# EAGLE board Tinkercad_Circuit (EAGLE 9.7.0)

Size 331.8 x 153.48 mm. Coordinates in mm from the lower left corner, seen from the top.
Outline: 0,0 331.8,0 331.8,153.48 0,153.48 0,0
Copper layers (1*16): Top 0.035mm / dielectric 1.5mm / Bottom 0.035mm
Design rules "default": minimum track width 6mil, minimum drill 0.35mm, track to track 6mil, track to pad 6mil, pad to pad 6mil, via to via 6mil, smd to smd 6mil, copper to edge 40mil, drill to drill 6mil, minimum pad ring 10mil, minimum via ring 8mil, stop-mask expansion 4mil, vias tented up to drill 0mil, thermal gap 10mil

## Footprints (pad centres in the part's own frame; a part is rotated, then mirrored left to right if it is on the bottom)
LEDRD254W60D565H860B = drill 0.981 pad 1.581: 1 -1.27,0; 2 1.27,0
BATTERY-GENERIC = drill 1.118 pad 3.15 octagon: + 2.54,0; - -2.54,0
RESAD1016W63L850D250B = drill 0.83 pad 1.43: 1 -5.08,0; 2 5.08,0
SWITCH-SPDT-PTH-8.5X3.7MM = drill 1.016 pad 1.88: 1 -2.54,0; 2 0,0; 3 2.54,0
DIP762W53P254L1969H508Q14B = drill 0.743 pad 1.343: 1 -3.81,7.62; 2 -3.81,5.08; 3 -3.81,2.54; 4 -3.81,0; 5 -3.81,-2.54; 6 -3.81,-5.08; 7 -3.81,-7.62; 8 3.81,-7.62; 9 3.81,-5.08; 10 3.81,-2.54; 11 3.81,0; 12 3.81,2.54; 13 3.81,5.08; 14 3.81,7.62

## Placement (x,y rotation side)
D1  RED  [LEDRD254W60D565H860B]  149.84,88.52 180 top
D2  RED  [LEDRD254W60D565H860B]  149.11,34.85 180 top
D3  RED  [LEDRD254W60D565H860B]  325.53,90.64 180 top
D4  RED  [LEDRD254W60D565H860B]  325.74,34.37 180 top
D5  RED  [LEDRD254W60D565H860B]  268.09,145.57 180 top
P1  BATTERYGENERIC  [BATTERY-GENERIC]  111.37,144.66 180 top
R1  1k  [RESAD1016W63L850D250B]  46.97,63.12 90 top
R2  1k  [RESAD1016W63L850D250B]  6.33,63.12 90 top
R3  1k  [RESAD1016W63L850D250B]  16.49,63.12 90 top
R4  1k  [RESAD1016W63L850D250B]  26.65,63.12 90 top
R5  1k  [RESAD1016W63L850D250B]  36.81,63.12 90 top
R6  1k  [RESAD1016W63L850D250B]  148.57,65.66 90 top
R7  1k  [RESAD1016W63L850D250B]  147.84,9.45 90 top
R8  1k  [RESAD1016W63L850D250B]  324.26,65.24 90 top
R9  1k  [RESAD1016W63L850D250B]  324.47,8.97 90 top
R10  1k  [RESAD1016W63L850D250B]  266.82,120.17 90 top
SA  TOGGLE  [SWITCH-SPDT-PTH-8.5X3.7MM]  8.87,78.36 0 top
SB  TOGGLE  [SWITCH-SPDT-PTH-8.5X3.7MM]  19.03,78.36 0 top
SC  TOGGLE  [SWITCH-SPDT-PTH-8.5X3.7MM]  29.19,78.36 0 top
SD  TOGGLE  [SWITCH-SPDT-PTH-8.5X3.7MM]  39.35,78.36 0 top
SE  TOGGLE  [SWITCH-SPDT-PTH-8.5X3.7MM]  49.51,78.36 0 top
U1  74HC04_PDIP  [DIP762W53P254L1969H508Q14B]  67.29,82.17 90 top
U2  74HC32_PDIP  [DIP762W53P254L1969H508Q14B]  87.61,82.17 90 top
U3  74HC11_PDIP  [DIP762W53P254L1969H508Q14B]  107.93,82.17 90 top
U4  74HC32_PDIP  [DIP762W53P254L1969H508Q14B]  128.25,82.17 90 top
U5  74HC32_PDIP  [DIP762W53P254L1969H508Q14B]  124.98,25.96 90 top
U6  74HC11_PDIP  [DIP762W53P254L1969H508Q14B]  104.66,25.96 90 top
U7  74HC32_PDIP  [DIP762W53P254L1969H508Q14B]  84.34,25.96 90 top
U8  74HC08_PDIP  [DIP762W53P254L1969H508Q14B]  64.02,25.96 90 top
U9  74HC04_PDIP  [DIP762W53P254L1969H508Q14B]  43.7,25.96 90 top
U10  74HC08_PDIP  [DIP762W53P254L1969H508Q14B]  220.12,81.75 90 top
U11  74HC08_PDIP  [DIP762W53P254L1969H508Q14B]  240.44,81.75 90 top
U12  74HC04_PDIP  [DIP762W53P254L1969H508Q14B]  199.8,81.75 90 top
U13  74HC11_PDIP  [DIP762W53P254L1969H508Q14B]  281.08,81.75 90 top
U14  74HC32_PDIP  [DIP762W53P254L1969H508Q14B]  260.76,81.75 90 top
U15  74HC32_PDIP  [DIP762W53P254L1969H508Q14B]  301.4,81.75 90 top
U16  74HC04_PDIP  [DIP762W53P254L1969H508Q14B]  200.01,25.48 90 top
U17  74HC32_PDIP  [DIP762W53P254L1969H508Q14B]  301.61,25.48 90 top
U18  74HC08_PDIP  [DIP762W53P254L1969H508Q14B]  240.65,25.48 90 top
U19  74HC32_PDIP  [DIP762W53P254L1969H508Q14B]  260.97,25.48 90 top
U20  74HC08_PDIP  [DIP762W53P254L1969H508Q14B]  281.29,25.48 90 top
U21  74HC11_PDIP  [DIP762W53P254L1969H508Q14B]  220.33,25.48 90 top
U22  74HC04_PDIP  [DIP762W53P254L1969H508Q14B]  210.94,136.68 90 top
U23  74HC11_PDIP  [DIP762W53P254L1969H508Q14B]  251.58,136.68 90 top
U24  74HC32_PDIP  [DIP762W53P254L1969H508Q14B]  231.26,136.68 90 top

## Library data of the parts
D1-D5 = Tinkercad; CATEGORY: Opto-Electronic; SUB-CATEGORY: LED; VALUE: LED_RED
P1 R1-R10 SA SB SC SD SE U1-U24 = Tinkercad

## Nets
D1_C: D1.2 R6.2
D2_C: D2.2 R7.2
D3_C: D3.2 R8.2
D4_C: D4.2 R9.2
D5_C: D5.2 R10.2
P1+: P1.+ R1.1 R2.1 R3.1 R4.1 R5.1 U1.14 U2.14 U3.14 U4.14 U5.14 U6.14 U7.14 U8.14 U9.14 U10.14 U11.14 U12.14 U13.14 U14.14 U15.14 U16.14 U17.14 U18.14 U19.14 U20.14 U21.14 U22.14 U23.14 U24.14
P1-: P1.- R6.1 R7.1 R8.1 R9.1 R10.1 SA.2 SB.2 SC.2 SD.2 SE.2 U1.7 U2.7 U3.7 U4.7 U5.7 U6.7 U7.7 U8.7 U9.7 U10.7 U11.7 U12.7 U13.7 U14.7 U15.7 U16.7 U17.7 U18.7 U19.7 U20.7 U21.7 U22.7 U23.7 U24.7
U1_1Y: U1.2 U3.13
U2_1Y: U2.3 U3.2
U3_1Y: U3.12 U4.1
U4_1Y: D1.1 U4.3
U5_1B: U5.2 U6.12
U5_1Y: D2.1 U5.3
U6_1A: R3.2 SB.1 U3.1 U6.1 U9.13 U10.2 U12.9 U13.13 U14.2 U16.3 U18.4
U6_2A: R2.2 SA.1 U4.2 U6.3 U9.5 U16.1 U18.1 U23.13
U6_2B: U6.4 U9.12
U6_2Y: U5.1 U6.6
U7_1Y: U6.13 U7.3
U7_2B: R1.2 SE.1 U1.1 U7.1 U7.5 U12.3 U13.2 U16.11 U18.9 U21.5 U22.1
U7_2Y: U6.5 U7.6
U8_1Y: U7.2 U8.3
U9_1A: R4.2 SC.1 U2.1 U9.1 U10.4 U11.5 U16.5 U18.5 U18.10 U21.1 U24.1
U9_1Y: U8.1 U9.2
U9_2A: R5.2 SD.1 U2.2 U7.4 U9.3 U10.5 U12.1 U12.5 U16.9 U21.4 U24.2
U9_2Y: U8.2 U9.4
U9_3Y: U6.2 U9.6
U10_2Y: U10.6 U14.1
U11_2Y: U11.6 U15.5
U11_3Y: U11.8 U15.1
U12_1Y: U10.1 U12.2
U12_2Y: U11.10 U12.4
U12_3Y: U12.6 U13.1
U12_4Y: U11.4 U12.8
U13_1Y: U13.12 U15.2
U14_1Y: U11.9 U14.3
U15_1Y: U15.3 U15.4
U15_2Y: D3.1 U15.6
U16_1Y: U16.2 U21.13
U16_2Y: U16.4 U21.2
U16_3Y: U16.6 U21.3
U16_4Y: U16.8 U18.2 U20.2
U16_5Y: U16.10 U20.13
U17_1Y: D4.1 U17.3
U17_3Y: U17.1 U17.8
U18_1Y: U18.3 U19.13
U18_2Y: U18.6 U19.1
U18_3Y: U18.8 U19.2
U19_1Y: U19.3 U20.1
U20_1Y: U17.10 U20.3
U20_4A: U19.11 U20.12
U20_4Y: U17.9 U20.11
U21_1Y: U19.12 U21.12
U21_2Y: U17.2 U21.6
U22_1Y: U22.2 U23.2
U23_1Y: D5.1 U23.12
U24_1Y: U23.1 U24.3

## Tracks (layer width: path | path; a pad name or v marks a point on that pad's centre or on a via)
D1_C  (1 unrouted)
D2_C  (1 unrouted)
D3_C  (1 unrouted)
D4_C  (1 unrouted)
D5_C  (1 unrouted)
P1+  (29 unrouted)
P1-  (34 unrouted)
U1_1Y  (1 unrouted)
U2_1Y  (1 unrouted)
U3_1Y  (1 unrouted)
U4_1Y  (1 unrouted)
U5_1B  (1 unrouted)
U5_1Y  (1 unrouted)
U6_1A  (10 unrouted)
U6_2A  (7 unrouted)
U6_2B  (1 unrouted)
U6_2Y  (1 unrouted)
U7_1Y  (1 unrouted)
U7_2B  (10 unrouted)
U7_2Y  (1 unrouted)
U8_1Y  (1 unrouted)
U9_1A  (10 unrouted)
U9_1Y  (1 unrouted)
U9_2A  (10 unrouted)
U9_2Y  (1 unrouted)
U9_3Y  (1 unrouted)
U10_2Y  (1 unrouted)
U11_2Y  (1 unrouted)
U11_3Y  (1 unrouted)
U12_1Y  (1 unrouted)
U12_2Y  (1 unrouted)
U12_3Y  (1 unrouted)
U12_4Y  (1 unrouted)
U13_1Y  (1 unrouted)
U14_1Y  (1 unrouted)
U15_1Y  (1 unrouted)
U15_2Y  (1 unrouted)
U16_1Y  (1 unrouted)
U16_2Y  (1 unrouted)
U16_3Y  (1 unrouted)
U16_4Y  (2 unrouted)
U16_5Y  (1 unrouted)
U17_1Y  (1 unrouted)
U17_3Y  (1 unrouted)
U18_1Y  (1 unrouted)
U18_2Y  (1 unrouted)
U18_3Y  (1 unrouted)
U19_1Y  (1 unrouted)
U20_1Y  (1 unrouted)
U20_4A  (1 unrouted)
U20_4Y  (1 unrouted)
U21_1Y  (1 unrouted)
U21_2Y  (1 unrouted)
U22_1Y  (1 unrouted)
U23_1Y  (1 unrouted)
U24_1Y  (1 unrouted)